# EAGLE board CT_schematic (EAGLE 7.6.0)

Size 100 x 80 mm. Coordinates in mm from the lower left corner, seen from the top.
Outline: 0,0 100,0 100,80 0,80 0,0
Copper layers (1*16): Top 0.035mm / dielectric 1.5mm / Bottom 0.035mm
Design rules "default": minimum track width 10mil, minimum drill 24mil, track to track 8mil, track to pad 8mil, pad to pad 8mil, via to via 8mil, smd to smd 8mil, copper to edge 40mil, drill to drill 8mil, minimum pad ring 10mil, minimum via ring 8mil, stop-mask expansion 4mil, vias tented up to drill 0mil, thermal gap 10mil

## Footprints (pad centres in the part's own frame; a part is rotated, then mirrored left to right if it is on the bottom)
C0603 = smd 0.8 x 0.8: 1 -0.762,0; 2 0.762,0
C0402 = smd 0.5 x 0.5: 1 -0.508,0; 2 0.508,0
C0805 = smd 1.2 x 1.3: 1 -1.016,0; 2 1.016,0
C1210 = smd 1.2 x 2.5: 1 -1.524,0; 2 1.524,0
2220 = smd 1.85 x 5.5: 1 -2.55,0; 2 2.55,0
R0603 = smd 0.8 x 0.8: 1 -0.762,0; 2 0.762,0
EXV-9H = smd 3.505 x 1.676: 1 -2.857,0; 2 2.857,0
L0603 = smd 0.8 x 0.8: 1 -0.762,0; 2 0.762,0
DR1040 = smd 1.6 x 3.2: 1 -4.458,0; 2 4.458,0
PJ-037B_PACKAGE = drill 3.7 square: 1 12,0 | drill 3.2 square: 2 6,0
TFBGA216 = smd 0.4 x 0.4: A1 -5.6,5.6; A2 -4.8,5.6; A3 -4,5.6; A4 -3.2,5.6; A5 -2.4,5.6; A6 -1.6,5.6; A7 -0.8,5.6; A8 0,5.6; A9 0.8,5.6; A10 1.6,5.6; A11 2.4,5.6; A12 3.2,5.6; A13 4,5.6; A14 4.8,5.6; A15 5.6,5.6; B1 -5.6,4.8; B2 -4.8,4.8; B3 -4,4.8; B4 -3.2,4.8; B5 -2.4,4.8; B6 -1.6,4.8; B7 -0.8,4.8; B8 0,4.8; B9 0.8,4.8; B10 1.6,4.8; B11 2.4,4.8; B12 3.2,4.8; B13 4,4.8; B14 4.8,4.8; B15 5.6,4.8; C1 -5.6,4; C2 -4.8,4; C3 -4,4; C4 -3.2,4; C5 -2.4,4; C6 -1.6,4; C7 -0.8,4; C8 0,4; C9 0.8,4; C10 1.6,4; C11 2.4,4; C12 3.2,4; C13 4,4; C14 4.8,4; C15 5.6,4; D1 -5.6,3.2; D2 -4.8,3.2; D3 -4,3.2; D4 -3.2,3.2; D5 -2.4,3.2; D6 -1.6,3.2; D7 -0.8,3.2; D8 0,3.2; D9 0.8,3.2; D10 1.6,3.2; D11 2.4,3.2; D12 3.2,3.2; D13 4,3.2; D14 4.8,3.2; D15 5.6,3.2; E1 -5.6,2.4; E2 -4.8,2.4; E3 -4,2.4; E4 -3.2,2.4; E5 -2.4,2.4; E6 -1.6,2.4; E7 -0.8,2.4; E8 0,2.4; E9 0.8,2.4; E10 1.6,2.4; E11 2.4,2.4; E12 3.2,2.4; E13 4,2.4; E14 4.8,2.4; E15 5.6,2.4; F1 -5.6,1.6; F2 -4.8,1.6; F3 -4,1.6; F4 -3.2,1.6; F5 -2.4,1.6; F6 -1.6,1.6; F7 -0.8,1.6; F8 0,1.6; F9 0.8,1.6; F10 1.6,1.6; F11 2.4,1.6; F12 3.2,1.6; F13 4,1.6; F14 4.8,1.6; F15 5.6,1.6; G1 -5.6,0.8; G2 -4.8,0.8; G3 -4,0.8; G4 -3.2,0.8; G5 -2.4,0.8; G6 -1.6,0.8; G10 1.6,0.8; G11 2.4,0.8; G12 3.2,0.8; G13 4,0.8; G14 4.8,0.8; G15 5.6,0.8; H1 -5.6,0; H2 -4.8,0; H3 -4,0; H4 -3.2,0; H5 -2.4,0; H6 -1.6,0; H10 1.6,0; H11 2.4,0; H12 3.2,0; H13 4,0; H14 4.8,0; H15 5.6,0; J1 -5.6,-0.8; J2 -4.8,-0.8; J3 -4,-0.8; J4 -3.2,-0.8; J5 -2.4,-0.8; J6 -1.6,-0.8; J10 1.6,-0.8; J11 2.4,-0.8; J12 3.2,-0.8; J13 4,-0.8; J14 4.8,-0.8; J15 5.6,-0.8; K1 -5.6,-1.6; K2 -4.8,-1.6; K3 -4,-1.6; K4 -3.2,-1.6; K5 -2.4,-1.6; K6 -1.6,-1.6; K7 -0.8,-1.6; K8 0,-1.6; K9 0.8,-1.6; K10 1.6,-1.6; K11 2.4,-1.6; K12 3.2,-1.6; K13 4,-1.6; K14 4.8,-1.6; K15 5.6,-1.6; L1 -5.6,-2.4; L2 -4.8,-2.4; L3 -4,-2.4; L4 -3.2,-2.4; L5 -2.4,-2.4; L6 -1.6,-2.4; L7 -0.8,-2.4; L8 0,-2.4; L9 0.8,-2.4; L10 1.6,-2.4; L11 2.4,-2.4; L12 3.2,-2.4; L13 4,-2.4; L14 4.8,-2.4; L15 5.6,-2.4; M1 -5.6,-3.2; M2 -4.8,-3.2; M3 -4,-3.2; M4 -3.2,-3.2; M5 -2.4,-3.2; M6 -1.6,-3.2; M7 -0.8,-3.2; M8 0,-3.2; M9 0.8,-3.2; M10 1.6,-3.2; M11 2.4,-3.2; M12 3.2,-3.2; M13 4,-3.2; M14 4.8,-3.2; M15 5.6,-3.2; N1 -5.6,-4; N2 -4.8,-4; N3 -4,-4; N4 -3.2,-4; N5 -2.4,-4; N6 -1.6,-4; N7 -0.8,-4; N8 0,-4; N9 0.8,-4; N10 1.6,-4; N11 2.4,-4; N12 3.2,-4; N13 4,-4; N14 4.8,-4; N15 5.6,-4; P1 -5.6,-4.8; P2 -4.8,-4.8; P3 -4,-4.8; P4 -3.2,-4.8; P5 -2.4,-4.8; P6 -1.6,-4.8; P7 -0.8,-4.8; P8 0,-4.8; P9 0.8,-4.8; P10 1.6,-4.8; P11 2.4,-4.8; P12 3.2,-4.8; P13 4,-4.8; P14 4.8,-4.8; P15 5.6,-4.8; R1 -5.6,-5.6; R2 -4.8,-5.6; R3 -4,-5.6; R4 -3.2,-5.6; R5 -2.4,-5.6; R6 -1.6,-5.6; R7 -0.8,-5.6; R8 0,-5.6; R9 0.8,-5.6; R10 1.6,-5.6; R11 2.4,-5.6; R12 3.2,-5.6; R13 4,-5.6; R14 4.8,-5.6; R15 5.6,-5.6
SOIC-8 = smd 1.6 x 0.6: 1 -2.7,1.905 | smd 1.55 x 0.6: 2 -2.7,0.635; 3 -2.7,-0.635; 4 -2.7,-1.905; 5 2.7,-1.905; 6 2.7,-0.635; 7 2.7,0.635; 8 2.7,1.905
TST-110-05-T-D-RA = drill 1 pad 1.7 square: 1 0,0 | drill 1 pad 1.7: 2 0,2.54; 3 2.54,0; 4 2.54,2.54; 5 5.08,0; 6 5.08,2.54; 7 7.62,0; 8 7.62,2.54; 9 10.16,0; 10 10.16,2.54; 11 12.7,0; 12 12.7,2.54; 13 15.24,0; 14 15.24,2.54; 15 17.78,0; 16 17.78,2.54; 17 20.32,0; 18 20.32,2.54; 19 22.86,0; 20 22.86,2.54
QFN-32 = smd 0.6 x 0.3: 1 -2.3,1.75; 2 -2.3,1.25; 3 -2.3,0.75; 4 -2.3,0.25; 5 -2.3,-0.25; 6 -2.3,-0.75; 7 -2.3,-1.25; 8 -2.3,-1.75; 17 2.3,-1.75; 18 2.3,-1.25; 19 2.3,-0.75; 20 2.3,-0.25; 21 2.3,0.25; 22 2.3,0.75; 23 2.3,1.25; 24 2.3,1.75 | smd 0.3 x 0.6: 9 -1.75,-2.3; 10 -1.25,-2.3; 11 -0.75,-2.3; 12 -0.25,-2.3; 13 0.25,-2.3; 14 0.75,-2.3; 15 1.25,-2.3; 16 1.75,-2.3; 25 1.75,2.3; 26 1.25,2.3; 27 0.75,2.3; 28 0.25,2.3; 29 -0.25,2.3; 30 -0.75,2.3; 31 -1.25,2.3; 32 -1.75,2.3 | smd 3.2 x 3.2: EXP 0,0
7498011122R = smd 0.71 x 2.29: 1 -3.545,-3.18; 2 -2.525,-3.18; 3 -1.505,-3.18; 4 -0.485,-3.18; 5 0.535,-3.18; 6 1.555,-3.18; 8 3.595,-3.18; 9 5.635,-3.18; 10 6.655,-3.18; 11 -6.605,-3.18; 12 -5.585,-3.18 | smd 1.4 x 2.54: 13 -8.51,10.2; 14 8.51,10.2 | hole 1.4: -3.5,0; 3.5,0
TDFN-8/6MM = smd 0.3 x 0.75: 1 0,0; 2 0.5,0; 3 1,0; 4 1.5,0; 5 1.5,3; 6 1,3; 7 0.5,3; 8 0,3
WFDN-8 = smd 0.48 x 0.7: 1 0,0; 2 1.27,0; 3 2.54,0; 4 3.81,0; 5 3.81,4.45; 6 2.54,4.45; 7 1.27,4.45; 8 0,4.45 | smd 4 x 3: 9 1.89,2.25
ASEK = smd 1.4 x 1: 1 -1.1,-0.8; 2 1.1,-0.8; 3 1.1,0.8; 4 -1.1,0.8
ASFL1 = smd 1.7 x 1.5: 1 -1.27,-1.1; 2 1.27,-1.1; 3 1.27,1.1; 4 -1.27,1.1
IDT74FCT38072 = smd 0.51 x 1: 1 0,0; 2 1.27,0; 3 2.54,0; 4 3.81,0; 5 3.81,4.95; 6 2.54,4.95; 7 1.27,4.95; 8 0,4.95
WSON-8 = smd 0.3 x 0.6: 1 -0.75,0; 2 0.05,0; 3 0.85,0; 4 1.65,0; 5 1.65,3.8; 6 0.85,3.8; 7 0.05,3.8; 8 -0.75,3.8 | smd 3 x 2.6: PAD 0.45,1.9
QFN-16_EP = smd 0.805 x 0.3: 1 -1.452,0.75; 2 -1.452,0.25; 3 -1.452,-0.25; 4 -1.452,-0.75; 9 1.452,-0.75; 10 1.452,-0.25; 11 1.452,0.25; 12 1.452,0.75 | smd 0.3 x 0.805: 5 -0.75,-1.452; 6 -0.25,-1.452; 7 0.25,-1.452; 8 0.75,-1.452; 13 0.75,1.452; 14 0.25,1.452; 15 -0.25,1.452; 16 -0.75,1.452 | smd 1.55 x 1.55: 17 0,0
QFN-38_UHF = smd 0.75 x 0.3: 1 -2.4,2.75; 2 -2.4,2.25; 3 -2.4,1.75; 4 -2.4,1.25; 6 -2.4,0.25; 7 -2.4,-0.25; 8 -2.4,-0.75; 9 -2.4,-1.25; 10 -2.4,-1.75; 11 -2.4,-2.25; 12 -2.4,-2.75; 20 2.4,-2.75; 21 2.4,-2.25; 22 2.4,-1.75; 23 2.4,-1.25; 24 2.4,-0.75; 25 2.4,-0.25; 26 2.4,0.25; 27 2.4,0.75; 28 2.4,1.25; 29 2.4,1.75; 30 2.4,2.25; 31 2.4,2.75 | smd 0.758 x 0.3: 5 -2.4,0.75 | smd 0.3 x 0.75: 13 -1.5,-3.4; 14 -1,-3.4; 15 -0.5,-3.4; 16 0,-3.4; 17 0.5,-3.4; 18 1,-3.4; 19 1.5,-3.4; 32 1.5,3.4; 33 1,3.4; 34 0.5,3.4; 35 0,3.4; 36 -0.5,3.4; 37 -1,3.4; 38 -1.5,3.4 | smd 3.2 x 5.2: 39 0,0
IRF8306MTRPBF = smd 0.9 x 1.85: 1 0,0; 2 0,-2.35; 6 6.4,0; 7 6.4,-2.35 | smd 0.75 x 0.75: 3 1.75,-1.175 | smd 1.45 x 0.87: 4 3.5,-0.565; 5 3.5,-1.785
SW_4-1437565-2 = smd 1.4 x 2.1: 1 -2.23,4.55; 2 -2.23,-4.55; 3 2.23,4.55; 4 2.23,-4.55
LGM67K-G1J2-24-Z = smd 0.8 x 1.4: A -2,0; C 0,0
NC7SZ125M5X = smd 1.3 x 0.7: 1 -1.3,0.95; 2 -1.3,0; 3 -1.3,-0.95; 4 1.3,-0.95; 5 1.3,0.95

## Placement (x,y rotation side)
C1  1e-06  [C0603]  -81.28,82.55 0 top  (outside the outline)
C2  1e-07  [C0603]  -85.09,82.55 0 top  (outside the outline)
C3  1e-07  [C0603]  -88.9,82.55 0 top  (outside the outline)
C4  1e-07  [C0603]  -15.24,87.63 0 top  (outside the outline)
C5  1e-07  [C0603]  -19.05,87.63 0 top  (outside the outline)
C6  1e-07  [C0603]  -22.86,87.63 0 top  (outside the outline)
C7  1e-07  [C0603]  -26.67,87.63 0 top  (outside the outline)
C8  1e-07  [C0603]  -30.48,87.63 0 top  (outside the outline)
C9  1e-07  [C0603]  -34.29,87.63 0 top  (outside the outline)
C10  1e-07  [C0603]  -38.1,87.63 0 top  (outside the outline)
C11  1e-07  [C0603]  -41.91,87.63 0 top  (outside the outline)
C12  1e-07  [C0603]  -45.72,87.63 0 top  (outside the outline)
C13  1e-07  [C0603]  -49.53,87.63 0 top  (outside the outline)
C14  1e-07  [C0603]  -53.34,87.63 0 top  (outside the outline)
C15  1e-07  [C0603]  -57.15,87.63 0 top  (outside the outline)
C16  1e-07  [C0603]  -60.96,87.63 0 top  (outside the outline)
C17  1e-07  [C0603]  -64.77,87.63 0 top  (outside the outline)
C18  1e-07  [C0603]  -68.58,87.63 0 top  (outside the outline)
C19  1e-07  [C0603]  -72.39,87.63 0 top  (outside the outline)
C20  1e-07  [C0603]  -76.2,87.63 0 top  (outside the outline)
C21  1e-07  [C0603]  -80.01,87.63 0 top  (outside the outline)
C22  4.7e-06  [C0603]  -69.85,82.55 0 top  (outside the outline)
C23  1e-08  [C0603]  -83.82,87.63 0 top  (outside the outline)
C24  1e-06  [C0603]  -87.63,87.63 0 top  (outside the outline)
C25  1e-07  [C0603]  -91.44,87.63 0 top  (outside the outline)
C26  1e-07  [C0603]  -15.24,92.71 0 top  (outside the outline)
C27  1e-07  [C0603]  -19.05,92.71 0 top  (outside the outline)
C28  1e-08  [C0402]  -60.96,97.79 0 top  (outside the outline)
C29  1e-07  [C0402]  -64.77,97.79 0 top  (outside the outline)
C30  1e-07  [C0402]  -68.58,97.79 0 top  (outside the outline)
C31  1e-07  [C0402]  -72.39,97.79 0 top  (outside the outline)
C32  2.2e-06  [C0603]  -73.66,82.55 0 top  (outside the outline)
C33  1e-07  [C0402]  -76.2,97.79 0 top  (outside the outline)
C34  1e-07  [C0402]  -80.01,97.79 0 top  (outside the outline)
C35  1e-05  [C0805]  -59.69,69.85 0 top  (outside the outline)
C36  1e-07  [C0402]  -83.82,97.79 0 top  (outside the outline)
C37  1e-08  [C0402]  -87.63,97.79 0 top  (outside the outline)
C38  1e-07  [C0402]  -91.44,97.79 0 top  (outside the outline)
C39  1e-08  [C0402]  -15.24,102.87 0 top  (outside the outline)
C40  1e-08  [C0402]  -19.05,102.87 0 top  (outside the outline)
C41  1e-08  [C0402]  -22.86,102.87 0 top  (outside the outline)
C42  1e-08  [C0402]  -26.67,102.87 0 top  (outside the outline)
C43  1e-08  [C0402]  -30.48,102.87 0 top  (outside the outline)
C44  1e-05  [C1210]  -29.21,71.12 0 top  (outside the outline)
C45  1e-05  [C0805]  -64.77,69.85 0 top  (outside the outline)
C46  1e-05  [C0805]  -69.85,69.85 0 top  (outside the outline)
C47  1e-06  [C0603]  -22.86,92.71 0 top  (outside the outline)
C48  1e-07  [C0402]  -34.29,102.87 0 top  (outside the outline)
C49  6.8e-05  [2220]  -46.99,44.45 0 top  (outside the outline)
C50  1e-08  [C0402]  -38.1,102.87 0 top  (outside the outline)
C51  1e-05  [C1210]  -35.56,71.12 0 top  (outside the outline)
C52  1e-05  [C0805]  -74.93,69.85 0 top  (outside the outline)
C53  1e-07  [C0402]  -41.91,102.87 0 top  (outside the outline)
C54  2.2e-06  [C0603]  -77.47,82.55 0 top  (outside the outline)
C55  2.45e-08  [R0603]  -50.8,77.47 0 top  (outside the outline)
C56  2.8258362168397e-09  [R0603]  -85.09,69.85 0 top  (outside the outline)
C57  7.105e-09  [R0603]  -90.17,69.85 0 top  (outside the outline)
C58  0.0001  [EXV-9H]  -74.93,63.5 0 top  (outside the outline)
C59  0.0001  [EXV-9H]  -86.36,63.5 0 top  (outside the outline)
C60  1e-08  [C0402]  -45.72,102.87 0 top  (outside the outline)
C61  1e-08  [C0402]  -49.53,102.87 0 top  (outside the outline)
C62  1e-08  [C0402]  -53.34,102.87 0 top  (outside the outline)
F1  240.0  [L0603]  -26.67,92.71 0 top  (outside the outline)
I1  97.0  [R0603]  -30.48,92.71 0 top  (outside the outline)
I5  5.2e-06  [DR1040]  -19.05,34.29 0 top  (outside the outline)
J1  PJ-037B  [PJ-037B_PACKAGE]  -64.77,7.62 0 top  (outside the outline)
R2  1000.0  [R0603]  -34.29,92.71 0 top  (outside the outline)
R7  4700.0  [R0603]  -38.1,92.71 0 top  (outside the outline)
R8  4700.0  [R0603]  -41.91,92.71 0 top  (outside the outline)
R9  2200.0  [R0603]  -45.72,92.71 0 top  (outside the outline)
R11  2200.0  [R0603]  -49.53,92.71 0 top  (outside the outline)
R13  2200.0  [R0603]  -53.34,92.71 0 top  (outside the outline)
R15  2200.0  [R0603]  -57.15,92.71 0 top  (outside the outline)
R17  10000.0  [R0603]  -55.88,77.47 0 top  (outside the outline)
R18  10000.0  [R0603]  -60.96,77.47 0 top  (outside the outline)
R19  10000.0  [R0603]  -66.04,77.47 0 top  (outside the outline)
R20  10000.0  [R0603]  -71.12,77.47 0 top  (outside the outline)
R21  10000.0  [R0603]  -76.2,77.47 0 top  (outside the outline)
R22  10000.0  [R0603]  -81.28,77.47 0 top  (outside the outline)
R23  10000.0  [R0603]  -86.36,77.47 0 top  (outside the outline)
R24  10000.0  [R0603]  -91.44,77.47 0 top  (outside the outline)
R25  0.1  [R0603]  -60.96,92.71 0 top  (outside the outline)
R26  0.1  [R0603]  -64.77,92.71 0 top  (outside the outline)
R27  200.0  [R0603]  -68.58,92.71 0 top  (outside the outline)
R28  220.0  [R0603]  -72.39,92.71 0 top  (outside the outline)
R29  6490.0  [R0603]  -76.2,92.71 0 top  (outside the outline)
R30  4700.0  [R0603]  -80.01,92.71 0 top  (outside the outline)
R31  4700.0  [R0603]  -83.82,92.71 0 top  (outside the outline)
R32  4700.0  [R0603]  -87.63,92.71 0 top  (outside the outline)
R33  4700.0  [R0603]  -91.44,92.71 0 top  (outside the outline)
R34  1000.0  [R0603]  -15.24,97.79 0 top  (outside the outline)
R35  4700.0  [R0603]  -19.05,97.79 0 top  (outside the outline)
R36  1000.0  [R0603]  -22.86,97.79 0 top  (outside the outline)
R37  1000.0  [R0603]  -26.67,97.79 0 top  (outside the outline)
R38  1000.0  [R0603]  -30.48,97.79 0 top  (outside the outline)
R39  1000.0  [R0603]  -34.29,97.79 0 top  (outside the outline)
R40  100000.0  [R0603]  -15.24,77.47 0 top  (outside the outline)
R41  100000.0  [R0603]  -20.32,77.47 0 top  (outside the outline)
R42  100000.0  [R0603]  -25.4,77.47 0 top  (outside the outline)
R43  100000.0  [R0603]  -30.48,77.47 0 top  (outside the outline)
R44  200.0  [R0603]  -38.1,97.79 0 top  (outside the outline)
R45  1000.0  [R0603]  -41.91,97.79 0 top  (outside the outline)
R46  20000.0  [R0603]  -15.24,82.55 0 top  (outside the outline)
R47  91000.0  [R0603]  -20.32,82.55 0 top  (outside the outline)
R48  300000.0  [R0603]  -35.56,77.47 0 top  (outside the outline)
R49  100000.0  [R0603]  -40.64,77.47 0 top  (outside the outline)
R50  200.0  [R0603]  -45.72,97.79 0 top  (outside the outline)
R51  1000.0  [R0603]  -49.53,97.79 0 top  (outside the outline)
R52  10000.0  [R0603]  -25.4,82.55 0 top  (outside the outline)
R53  75000.0  [R0603]  -30.48,82.55 0 top  (outside the outline)
R54  10000.0  [R0603]  -35.56,82.55 0 top  (outside the outline)
R55  10000.0  [R0603]  -40.64,82.55 0 top  (outside the outline)
R56  95300.0  [R0603]  -45.72,82.55 0 top  (outside the outline)
R57  95300.0  [R0603]  -50.8,82.55 0 top  (outside the outline)
R58  10000.0  [R0603]  -55.88,82.55 0 top  (outside the outline)
R59  10000.0  [R0603]  -60.96,82.55 0 top  (outside the outline)
R60  10000.0  [R0603]  -66.04,82.55 0 top  (outside the outline)
R61  110000.0  [R0603]  -45.72,77.47 0 top  (outside the outline)
U1  STM32F469NIH6  [TFBGA216]  -43.18,8.89 0 top  (outside the outline)
U2  AT25512N-SH-T  [SOIC-8]  -86.36,33.02 0 top  (outside the outline)
U3  TST-110-05-T-D-RA  [TST-110-05-T-D-RA]  -46.99,60.96 0 top  (outside the outline)
U4  KSZ8081RNBIA-TR  [QFN-32]  -57.15,34.29 0 top  (outside the outline)
U5  7498011122R  [7498011122R]  -22.86,7.62 0 top  (outside the outline)
U6  24AA02T-I/MNY  [TDFN-8/6MM]  -73.66,33.02 0 top  (outside the outline)
U7  SST26VF064B-104I/MF  [WFDN-8]  -43.18,31.75 0 top  (outside the outline)
U8  ASEK-32.768KHz-ECST  [ASEK]  -66.04,63.5 0 top  (outside the outline)
U9  ASFL1-25MHZ-NCS  [ASFL1]  -26.67,54.61 0 top  (outside the outline)
U10  ASFL1-50MHZ-NCS  [ASFL1]  -43.18,54.61 0 top  (outside the outline)
U11  idt74fct38072  [IDT74FCT38072]  -72.39,50.8 0 top  (outside the outline)
U12  LP3878SDX-ADJ/NOPB  [WSON-8]  -68.58,43.18 0 top  (outside the outline)
U13  LTC3601EUD#PBF  [QFN-16_EP]  -54.61,97.79 0 top  (outside the outline)
U14  LP3878SDX-ADJ/NOPB  [WSON-8]  -88.9,43.18 0 top  (outside the outline)
U15  LTC2928CUHF#PBF  [QFN-38_UHF]  -50.8,53.34 0 top  (outside the outline)
U16  IRF8306MTRPbF  [IRF8306MTRPBF]  -26.67,45.72 0 top  (outside the outline)
U17  IRF8306MTRPbF  [IRF8306MTRPBF]  -41.91,45.72 0 top  (outside the outline)
U18  4-1437565-2  [SW_4-1437565-2]  -81.28,6.35 0 top  (outside the outline)
U19  Q65110A2395  [LGM67K-G1J2-24-Z]  -17.78,71.12 0 top  (outside the outline)
U20  nc7sz125m5x  [NC7SZ125M5X]  -40.64,69.85 0 top  (outside the outline)
U21  nc7sz125m5x  [NC7SZ125M5X]  -46.99,69.85 0 top  (outside the outline)
U22  nc7sz125m5x  [NC7SZ125M5X]  -53.34,69.85 0 top  (outside the outline)

## Library data of the parts
C1-C62 F1 I1 I5 J1 R2 R7-R9 R11 R13 R15 R17-R61 U1-U22 = circuit_tree

## Nets
CLK_U1_E1: U1.E1 U8.3
CLK_U1_G1: U1.G1 U9.3
CLK_U1_N2: U1.N2 U11.7
CLK_U4_9: U4.9 U11.6
CLK_U11_3: U10.3 U11.3
GND: C1.2 C2.2 C3.2 C4.2 C5.2 C6.2 C7.2 C8.2 C9.2 C10.2 C11.2 C12.2 C13.2 C14.2 C15.2 C16.2 C17.2 C18.2 C19.2 C20.2 C21.2 C22.2 C23.2 C24.2 C25.2 C26.2 C27.2 C28.2 C29.2 C30.2 C31.2 C32.2 C33.2 C34.2 C35.2 C36.2 C37.2 C38.2 C39.2 C40.2 C41.2 C42.2 C43.2 C44.2 C45.2 C46.2 C47.2 C49.1 C49.2 C50.2 C51.2 C52.2 C53.2 C54.2 C55.2 C56.2 C57.2 C58.2 C59.2 C60.2 C61.2 C62.2 J1.2 R2.2 R19.2 R25.2 R26.2 R29.2 R31.2 R34.2 R36.2 R37.2 R38.2 R39.2 R45.2 R46.2 R48.2 R51.2 R53.2 R56.2 R57.2 R58.2 R59.2 R60.2 U1.F2 U1.F6 U1.F7 U1.F8 U1.F9 U1.F10 U1.G6 U1.G10 U1.G12 U1.H6 U1.H10 U1.J6 U1.J10 U1.K6 U1.K7 U1.K8 U1.K9 U1.K10 U1.L6 U1.M1 U1.N1 U2.4 U3.4 U3.6 U3.8 U3.10 U3.12 U3.14 U3.16 U3.18 U3.20 U4.1 U4.EXP U5.1 U5.10 U6.4 U6.7 U7.4 U7.9 U8.2 U9.2 U10.2 U11.4 U11.5 U11.8 U12.3 U12.PAD U13.1 U13.9 U13.17 U14.3 U14.PAD U15.8 U15.9 U15.10 U15.12 U15.13 U15.24 U15.25 U15.30 U15.32 U15.39 U19.C U20.2 U20.3 U21.1 U21.3 U22.1 U22.3
NET_U1_A7: R9.1 U1.A7 U6.6
NET_U1_B4: R11.1 U1.B4 U6.5
NET_U1_E5: R17.1 U1.E5
NET_U1_E6: R18.1 U1.E6
NET_U1_E11: C27.1 U1.E11
NET_U1_G13: U1.G13
NET_U1_J1: R8.1 U1.J1 U22.4
NET_U1_K12: U1.K12
NET_U1_L5: R20.1 U1.L5
NET_U1_M3: R13.1 U1.M3 U4.12
NET_U1_M5: R19.1 U1.M5
NET_U1_P2: R15.1 U1.P2 U4.11
NET_U1_R1: C23.1 C24.1 F1.1 U1.P1 U1.R1
NET_U1_R14: U19.A
NET_U1_R15: U18.3 U18.4
NET_U2_3: R21.1 U2.3
NET_U2_7: R23.1 U2.7
NET_U4_2: C32.1 C33.1 U4.2
NET_U4_3: C34.1 I1.1 U4.3
NET_U4_10: R29.1 U4.10
NET_U4_13: R32.1 U4.13
NET_U4_14: R33.1 U4.14
NET_U4_19: R31.1 U4.19
NET_U4_20: R37.1 U4.20
NET_U4_21: R30.1 U4.21
NET_U4_28: R35.1 U4.28
NET_U4_29: R36.1 U4.29
NET_U4_31: R38.1 U4.31
NET_U4_32: R7.1 U4.32 U21.4
NET_U5_1: U4.7 U5.1
NET_U5_2: C30.1 U5.2
NET_U5_3: U4.6 U5.3
NET_U5_4: U4.5 U5.4
NET_U5_5: C31.1 U5.5
NET_U5_6: U4.4 U5.6
NET_U5_8: R26.1 U5.8
NET_U5_9: R27.1 U5.9
NET_U5_12: R28.1 U5.12
NET_U5_13: R25.1 U5.13 U5.14
NET_U5_30: R27.2
NET_U5_31: R28.2
NET_U12_1: C43.1 U12.1
NET_U12_6: R44.2 R45.1 U12.6
NET_U12_8: R43.1 U12.8
NET_U13_3: C48.2 I5.1 U13.3 U13.4
NET_U13_6: C48.1 U13.6
NET_U13_7: C47.1 U13.7 U13.12
NET_U13_10: R48.1 U13.10
NET_U13_11: R46.1 R47.1 U13.11
NET_U13_14: U13.14
NET_U13_ATNET_3: I5.2 R47.2
NET_U14_1: C50.1 U14.1
NET_U14_6: R50.2 R51.1 U14.6
NET_U14_8: R49.1 U14.8
NET_U15_3: R59.1 U15.3
NET_U15_6: R56.1 U15.6
NET_U15_7: R57.1 U15.7
NET_U15_16: R58.1 R61.1 U15.16
NET_U15_18: R55.1 U15.18
NET_U15_19: R54.1 U15.19 U15.20
NET_U15_21: R52.1 R53.1 U15.21 U20.4 U21.2 U22.2
NET_U15_22: C53.1 R52.2 R54.2 R55.2 U15.11 U15.22
NET_U15_26: C56.1 U15.26
NET_U15_27: C55.1 U15.27
NET_U15_28: C57.1 U15.28
NET_U15_38: R60.1 U15.38
NET_U16_3: U15.2 U16.3
NET_U17_3: U15.37 U17.3
NET_U18_1: R2.1 U18.1 U18.2
PROC_ETH_CRS_DV: U1.R3 U4.18
PROC_ETH_RXD0: R39.1 U1.N5 U4.16
PROC_ETH_RXD1: R34.1 U1.P5 U4.15
PROC_ETH_TX_EN: U1.B8 U4.23
PROC_ETH_TXD0: U1.B3 U4.24
PROC_ETH_TXD1: U1.A4 U4.25
PROC_QUADSPI_BK1_IO0: U1.F14 U7.5
PROC_QUADSPI_BK1_IO1: U1.B14 U7.2
PROC_QUADSPI_BK1_IO2: R41.1 U1.A3 U7.3
PROC_QUADSPI_BK1_IO3: R42.1 U1.K2 U7.7
PROC_QUADSPI_BK1_NCS: R40.1 U1.B6 U7.1
PROC_QUADSPI_CLK: U1.L1 U7.6
PROC_SPI1_MISO: U1.A9 U2.2
PROC_SPI1_MOSI: U1.A8 U2.5
PROC_SPI1_NSS: R22.1 U1.A13 U2.1
PROC_SPI1_SCK: U1.P4 U2.6
PROC_SYS_JTCK_SWCLK: U1.A14 U3.9
PROC_SYS_JTDO_SWO: U1.A10 U3.13
PROC_SYS_JTMS_SWDIO: U1.A15 U3.7
RST_OUT_U3_SRESET_B: R24.1 U3.15 U20.1
VCC_13V3: C54.1 C58.1 C59.1 J1.1 R61.2 U15.23 U16.1 U16.2 U16.6 U16.7 U17.1 U17.2 U17.6 U17.7
VCC_S1_13V3: C44.1 C46.1 R43.2 U12.4 U13.15 U13.16 U16.4 U16.5
VCC_S2_13V3: C51.1 R49.2 U14.4 U17.4 U17.5
VCC_TIER1_1V2: C26.1 C45.1 R44.1 U1.L11 U12.5
VCC_TIER1_3V3: C1.1 C2.1 C3.1 C4.1 C5.1 C6.1 C7.1 C8.1 C9.1 C10.1 C11.1 C12.1 C13.1 C14.1 C15.1 C16.1 C17.1 C18.1 C19.1 C20.1 C21.1 C22.1 C25.1 C28.1 C29.1 C35.1 C36.1 C37.1 C38.1 C39.1 C40.1 C41.1 C42.1 C49.2 C60.1 C61.1 C62.1 F1.2 I1.2 I5.2 R7.2 R8.2 R9.2 R11.2 R13.2 R15.2 R17.2 R18.2 R20.2 R21.2 R22.2 R23.2 R24.2 R30.2 R32.2 R33.2 R35.2 R40.2 R41.2 R42.2 R47.2 U1.C1 U1.E7 U1.E8 U1.E9 U1.E10 U1.F4 U1.F5 U1.F11 U1.G5 U1.G11 U1.H5 U1.H11 U1.J5 U1.J11 U1.K5 U1.K11 U1.L7 U1.L8 U1.L9 U1.L10 U2.8 U3.1 U4.17 U6.8 U7.8 U8.4 U9.4 U10.4 U11.1 U11.2 U13.8 U20.5 U21.5 U22.5
VCC_TIER2_1V2: C52.1 R50.1 U14.5

## Tracks (layer width: path | path; a pad name or v marks a point on that pad's centre or on a via)
CLK_U1_E1  (1 unrouted)
CLK_U1_G1  (1 unrouted)
CLK_U1_N2  (1 unrouted)
CLK_U4_9  (1 unrouted)
CLK_U11_3  (1 unrouted)
GND  (152 unrouted)
NET_U1_A7  (2 unrouted)
NET_U1_B4  (2 unrouted)
NET_U1_E5  (1 unrouted)
NET_U1_E6  (1 unrouted)
NET_U1_E11  (1 unrouted)
NET_U1_J1  (2 unrouted)
NET_U1_L5  (1 unrouted)
NET_U1_M3  (2 unrouted)
NET_U1_M5  (1 unrouted)
NET_U1_P2  (2 unrouted)
NET_U1_R1  (4 unrouted)
NET_U1_R15  (1 unrouted)
NET_U2_3  (1 unrouted)
NET_U2_7  (1 unrouted)
NET_U4_2  (2 unrouted)
NET_U4_3  (2 unrouted)
NET_U4_10  (1 unrouted)
NET_U4_13  (1 unrouted)
NET_U4_14  (1 unrouted)
NET_U4_19  (1 unrouted)
NET_U4_20  (1 unrouted)
NET_U4_21  (1 unrouted)
NET_U4_28  (1 unrouted)
NET_U4_29  (1 unrouted)
NET_U4_31  (1 unrouted)
NET_U4_32  (2 unrouted)
NET_U5_1  (1 unrouted)
NET_U5_2  (1 unrouted)
NET_U5_3  (1 unrouted)
NET_U5_4  (1 unrouted)
NET_U5_5  (1 unrouted)
NET_U5_6  (1 unrouted)
NET_U5_8  (1 unrouted)
NET_U5_9  (1 unrouted)
NET_U5_12  (1 unrouted)
NET_U5_13  (2 unrouted)
NET_U12_1  (1 unrouted)
NET_U12_6  (2 unrouted)
NET_U12_8  (1 unrouted)
NET_U13_3  (3 unrouted)
NET_U13_6  (1 unrouted)
NET_U13_7  (2 unrouted)
NET_U13_10  (1 unrouted)
NET_U13_11  (2 unrouted)
NET_U13_ATNET_3  (1 unrouted)
NET_U14_1  (1 unrouted)
NET_U14_6  (2 unrouted)
NET_U14_8  (1 unrouted)
NET_U15_3  (1 unrouted)
NET_U15_6  (1 unrouted)
NET_U15_7  (1 unrouted)
NET_U15_16  (2 unrouted)
NET_U15_18  (1 unrouted)
NET_U15_19  (2 unrouted)
NET_U15_21  (5 unrouted)
NET_U15_22  (5 unrouted)
NET_U15_26  (1 unrouted)
NET_U15_27  (1 unrouted)
NET_U15_28  (1 unrouted)
NET_U15_38  (1 unrouted)
NET_U16_3  (1 unrouted)
NET_U17_3  (1 unrouted)
NET_U18_1  (2 unrouted)
PROC_ETH_CRS_DV  (1 unrouted)
PROC_ETH_RXD0  (2 unrouted)
PROC_ETH_RXD1  (2 unrouted)
PROC_ETH_TX_EN  (1 unrouted)
PROC_ETH_TXD0  (1 unrouted)
PROC_ETH_TXD1  (1 unrouted)
PROC_QUADSPI_BK1_IO0  (1 unrouted)
PROC_QUADSPI_BK1_IO1  (1 unrouted)
PROC_QUADSPI_BK1_IO2  (2 unrouted)
PROC_QUADSPI_BK1_IO3  (2 unrouted)
PROC_QUADSPI_BK1_NCS  (2 unrouted)
PROC_QUADSPI_CLK  (1 unrouted)
PROC_SPI1_MISO  (1 unrouted)
PROC_SPI1_MOSI  (1 unrouted)
PROC_SPI1_NSS  (2 unrouted)
PROC_SPI1_SCK  (1 unrouted)
PROC_SYS_JTCK_SWCLK  (1 unrouted)
PROC_SYS_JTDO_SWO  (1 unrouted)
PROC_SYS_JTMS_SWDIO  (1 unrouted)
RST_OUT_U3_SRESET_B  (2 unrouted)
VCC_13V3  (13 unrouted)
VCC_S1_13V3  (7 unrouted)
VCC_S2_13V3  (4 unrouted)
VCC_TIER1_1V2  (4 unrouted)
VCC_TIER1_3V3  (94 unrouted)
VCC_TIER2_1V2  (2 unrouted)